# EAGLE board Shiny Kup (EAGLE 9.7.0)

Size 164.15 x 108.01 mm. Coordinates in mm from the lower left corner, seen from the top.
Outline: 0,0 164.15,0 164.15,108.01 0,108.01 0,0
Copper layers (1*16): Top 0.035mm / dielectric 1.5mm / Bottom 0.035mm
Design rules "default": minimum track width 6mil, minimum drill 0.35mm, track to track 6mil, track to pad 6mil, pad to pad 6mil, via to via 6mil, smd to smd 6mil, copper to edge 40mil, drill to drill 6mil, minimum pad ring 10mil, minimum via ring 8mil, stop-mask expansion 4mil, vias tented up to drill 0mil, thermal gap 10mil

## Footprints (pad centres in the part's own frame; a part is rotated, then mirrored left to right if it is on the bottom)
USB-A = drill 0.8: 1 -3.81,0; 2 -1.27,0; 3 1.27,0; 4 3.81,0
RESAD1016W63L850D250B = drill 0.83 pad 1.43: 1 -5.08,0; 2 5.08,0
SWITCH-SPDT-PTH-8.5X3.7MM = drill 1.016 pad 1.88: 1 -2.54,0; 2 0,0; 3 2.54,0
TO92 = drill 0.813 octagon: 1 -1.27,0; 2 0,1.905; 3 1.27,0
ARDUINO-UNO-R3-SHIELD = drill 1.016 pad 1.88: 3.3V 24.13,-2.54; 5V 24.13,0; A0 24.13,12.7; A1 24.13,15.24; A2 24.13,17.78; A3 24.13,20.32; A4 24.13,22.86; A5 24.13,25.4; AREF -24.13,-13.97; D2 -24.13,20.32; D3 -24.13,17.78; D4 -24.13,15.24; D5 -24.13,12.7; D6 -24.13,10.16; D7 -24.13,7.62; D8 -24.13,3.81; D9 -24.13,1.27; D10 -24.13,-1.27; D11 -24.13,-3.81; D12 -24.13,-6.35; D13 -24.13,-8.89; GND@0 24.13,2.54; GND@1 24.13,5.08; GND@2 -24.13,-11.43; IOREF 24.13,-7.62; NC 24.13,-10.16; RES 24.13,-5.08; RX -24.13,25.4; SCL -24.13,-19.05; SDA -24.13,-16.51; TX -24.13,22.86; VIN 24.13,7.62

## Placement (x,y rotation side)
JPDETECTEUR_DE_TENSION  USB-A-CABLE_PTH  [USB-A]  158.18,58.21 90 top
R1  1k  [RESAD1016W63L850D250B]  116.2,89.91 270 top
R2  1k  [RESAD1016W63L850D250B]  116.2,77.21 270 top
R3  4.7k  [RESAD1016W63L850D250B]  121.28,69.59 180 top
R4  4.7k  [RESAD1016W63L850D250B]  116.2,56.89 90 top
SBOUTON  TOGGLE  [SWITCH-SPDT-PTH-8.5X3.7MM]  141.27,86.78 270 top
UDHT11  TMP36GT9Z_TO92  [TO92]  60.37,4.83 0 top
ULORA  ARDUINO-UNO-R3-SHIELD  [ARDUINO-UNO-R3-SHIELD]  29.84,60.13 180 top
USONDE  TMP36GT9Z_TO92  [TO92]  156.11,69.95 270 top
USOUND_SENSOR  TMP36GT9Z_TO92  [TO92]  135.96,31.19 270 top

## Library data of the parts
JPDETECTEUR_DE_TENSION R1-R4 SBOUTON UDHT11 ULORA USONDE USOUND_SENSOR = Tinkercad

## Nets
JPDETECTEUR_DE_TENSION_GND: JPDETECTEUR_DE_TENSION.1 UDHT11.1 ULORA.GND@0 ULORA.GND@1 ULORA.GND@2 USOUND_SENSOR.1
JPDETECTEUR_DE_TENSION_VCC: JPDETECTEUR_DE_TENSION.4 R4.2
SBOUTON_P: R1.1 SBOUTON.2
SBOUTON_S: R2.1 SBOUTON.3
ULORA_3.3V: R3.1 SBOUTON.1 ULORA.3.3V USONDE.1 USONDE.3 USOUND_SENSOR.3
ULORA_5V: UDHT11.3 ULORA.5V
ULORA_A0: R4.1 ULORA.A0
ULORA_A3: ULORA.A3 USOUND_SENSOR.2
ULORA_D2: UDHT11.2 ULORA.D2
ULORA_D3: R3.2 ULORA.D3 USONDE.2
ULORA_D6: R2.2 ULORA.D6
ULORA_D7: R1.2 ULORA.D7

## Tracks (layer width: path | path; a pad name or v marks a point on that pad's centre or on a via)
JPDETECTEUR_DE_TENSION_GND  (5 unrouted)
JPDETECTEUR_DE_TENSION_VCC  (1 unrouted)
SBOUTON_P  (1 unrouted)
SBOUTON_S  (1 unrouted)
ULORA_3.3V  (5 unrouted)
ULORA_5V  (1 unrouted)
ULORA_A0  (1 unrouted)
ULORA_A3  (1 unrouted)
ULORA_D2  (1 unrouted)
ULORA_D3  (2 unrouted)
ULORA_D6  (1 unrouted)
ULORA_D7  (1 unrouted)